# Altium PCB CH32V20xG8-R0-1v1.PcbDoc
Units mil, origin at the board's own origin, x right, y up, seen from the top; angles counter-clockwise.
Board outline 1755.91 x 2204.72 mil, 2 copper layers (Top Layer, Bottom Layer); 24 components, 39 nets, 126 pads, 528 vias.
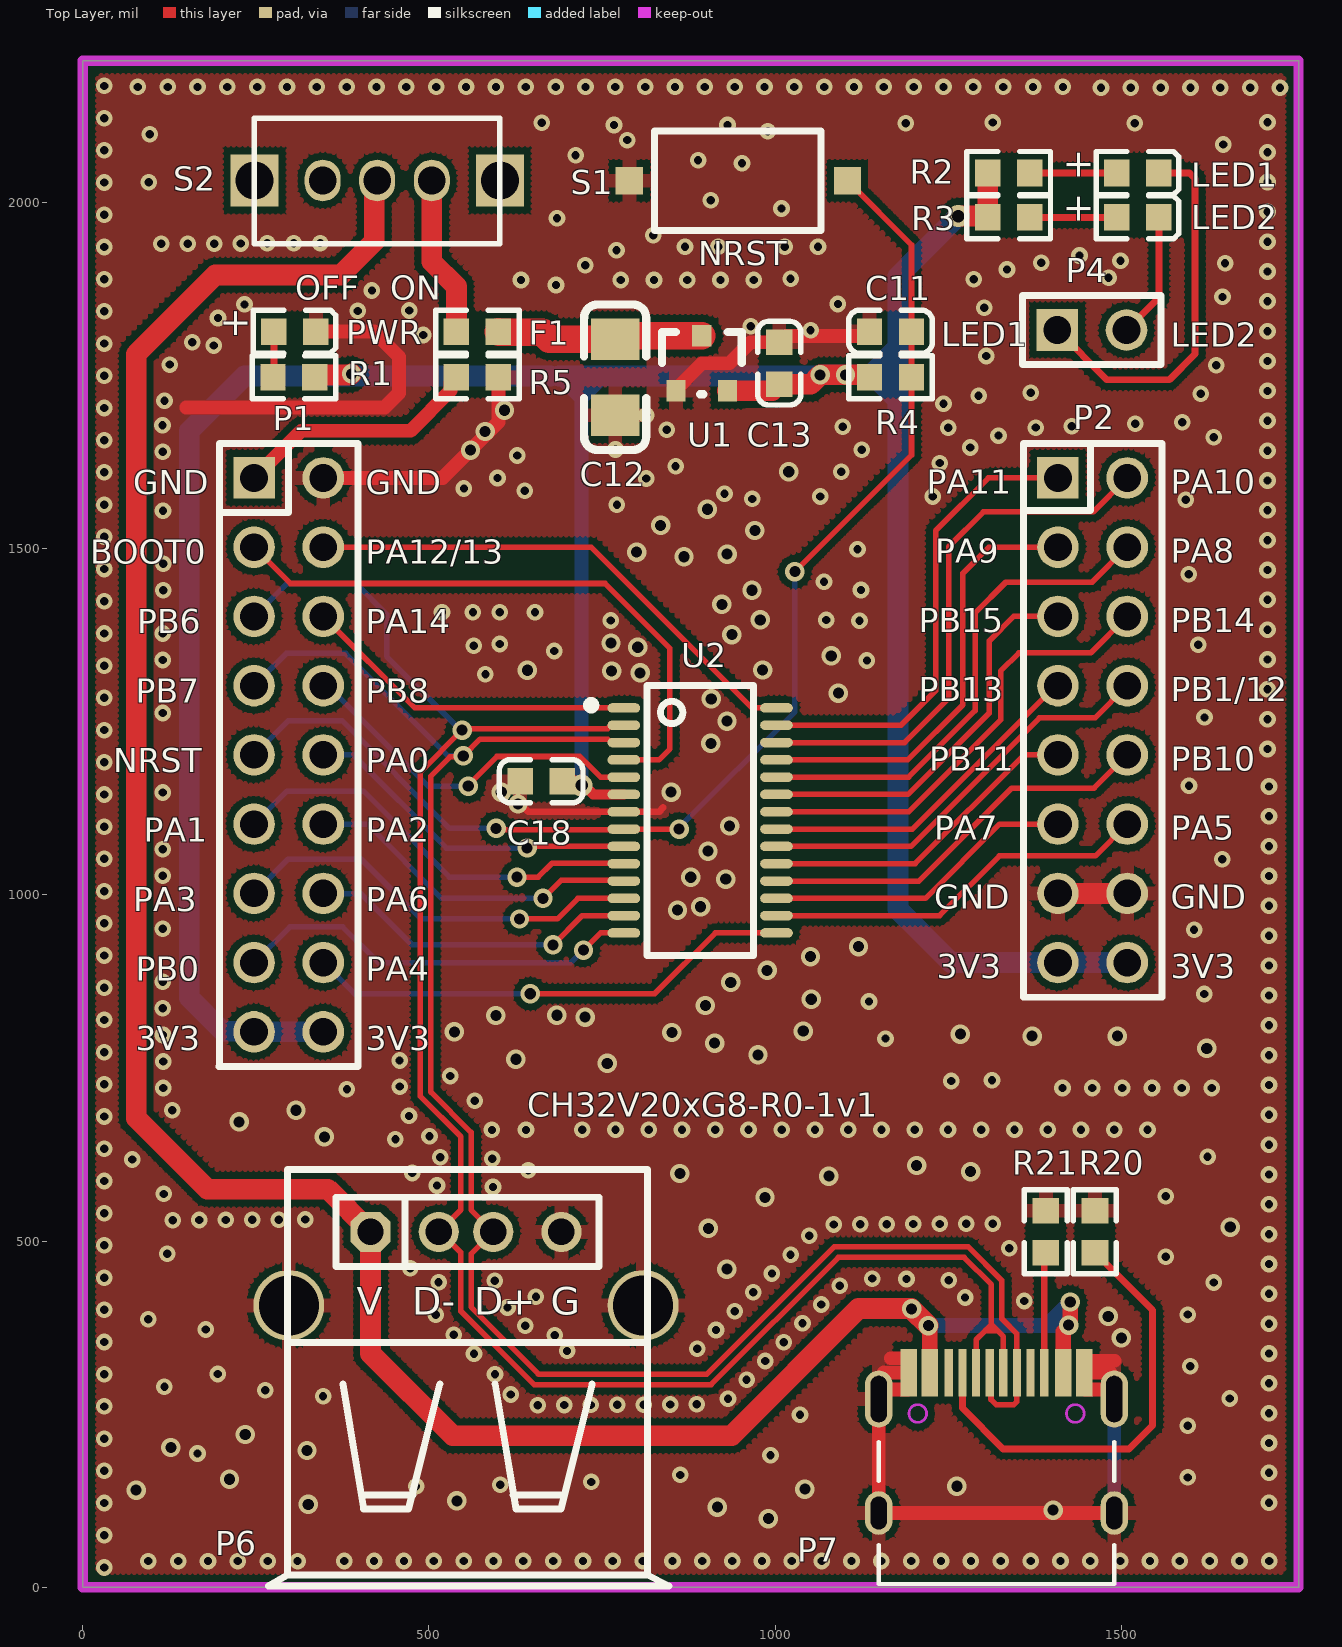
[diagram p0: Top Layer view]
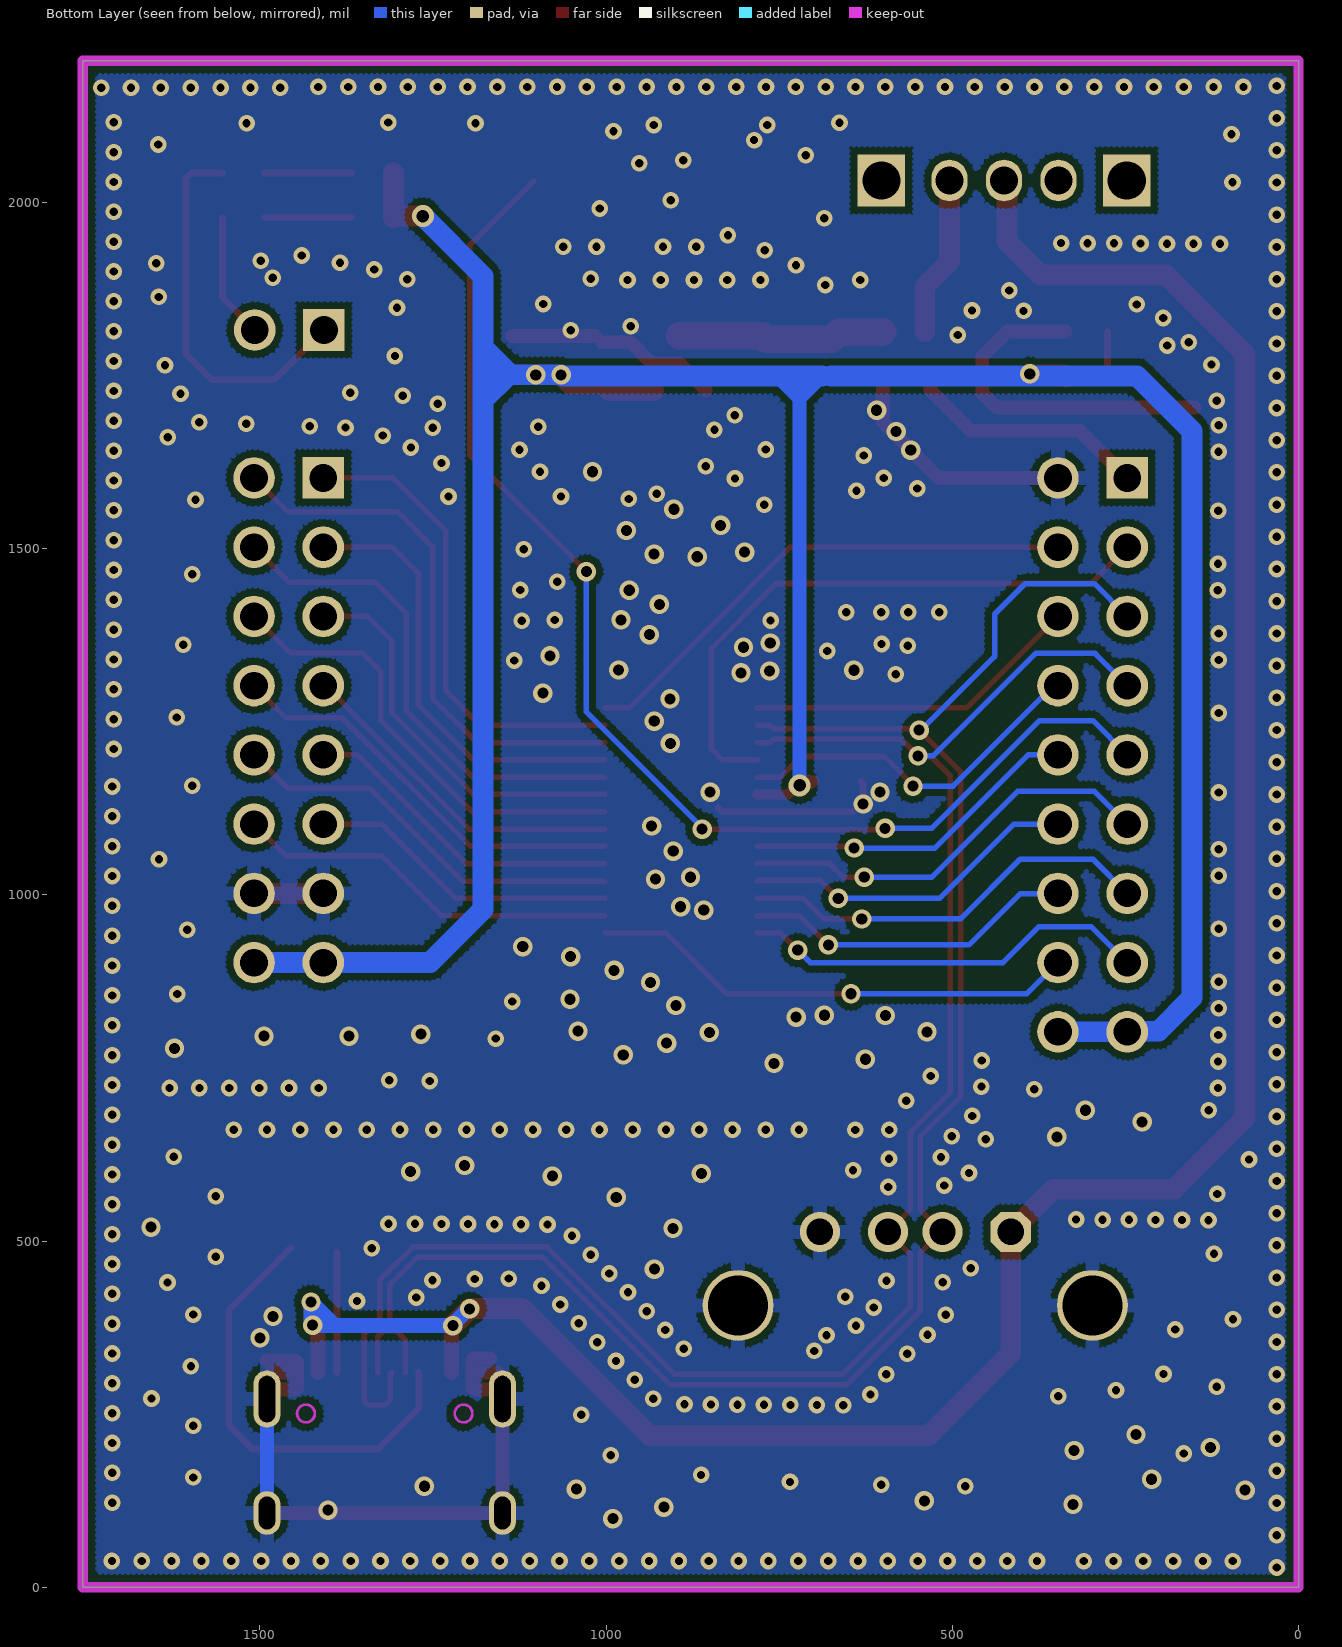
[diagram p1: Bottom Layer view, seen from below]

## Layer stack, top to bottom
Top Solder: solder mask 0.4, Solder Resist, Dk 3.5
Top Layer: signal copper 1.4
Dielectric 1: dielectric 12.6, FR-4, Dk 4.8
Bottom Layer: signal copper 1.4
Bottom Solder: solder mask 0.4, Solder Resist, Dk 3.5

## Board outline
0,0 0,2204.72 1755.91,2204.72 1755.91,0 1751.97,0

## Design rules (kind name [scope] priority, off if disabled: settings)
Clearance Clearance_1 [InPolygon] p1: gap=10 ignorepadtopadclearanceinfootprint=FALSE
Clearance [All] p2: gap=7 ignorepadtopadclearanceinfootprint=FALSE
ComponentClearance [All] p1 off: gap=10 collisioncheckmode=3 verticalgap=10 showdistances=FALSE
DiffPairsRouting [All] p1: maxlimit=10 minlimit=7 mostfreqgap=8 toplayer_minwidth=6 toplayer_maxwidth=15 toplayer_prefwidth=8 bottomlayer_minwidth=6 bottomlayer_maxwidth=15 bottomlayer_prefwidth=8 maxuncoupledlength=500
MinimumSolderMaskSliver [All] p1 off: minsoldermaskwidth=10
PolygonConnect PolygonConnect_1 [IsVia] p1: connectstyle=Direct reliefconductorwidth=10 reliefentries=4 polygonreliefangle="90 Angle" airgapwidth=10
PolygonConnect [All] p2: connectstyle=Relief reliefconductorwidth=20 reliefentries=4 polygonreliefangle="90 Angle" airgapwidth=10
RoutingVias [All] p1: holewidth=16 width=28 viastyle="Through Hole" minholewidth=12 minwidth=24 maxholewidth=28 maxwidth=50
SilkToSilkClearance [All] p1 off: silktosilkclearance=10
SilkToSolderMaskClearance [IsPad] p1 off: minsilkscreentomaskgap=10 clearancetoexposedcopper=TRUE
SolderMaskExpansion [All] p1: expansion=4 istentingtop=FALSE
Width [All] p1: maxlimit=100 minlimit=6 preferedwidth=10
25 further rules are at their usual default settings.

## Classes and differential pairs
differential pair NewDifferentialPair1: +PB6 -PB7

## Components (designator, comment, footprint, x,y, rotation, side; value= is the part's Value field where it differs from the comment)
C11 "0.1uF" 0603_C 1136.33,1813.47 r0 top
C12 "10uF" 3216_C 769.01,1802.61 r90 top
C13 "2.2uF" 0603_C 1006.01,1798.24 r270 top
C18 "0.1uF" 0603_C 631.77,1163.97 r0 top
F1 "500mA" 0603 539.7,1813.47 r0 top
LED1 "LED1   blue" 0603+ 1493.6,2042.52 r0 top
LED2 "LED2  blue" 0603+ 1493.6,1978.52 r0 top
P1 "HEADER 9x2" IDC18-2.54MM 247.4,1602.17 r0 top
P2 "Header 8X2" IDC16-2.54mm 1408.5,1602.17 r0 top
P4 "2HEAD" SIP2-2.54mm 1407.5,1815.84 r270 top
P6 "USB_A" USBAF 415.69,513.31 r0 top
P7 "TYPE-C" TYPE-C-Receptacle-2.0 1319.74,310 r0 top
PWR "POWER  red" 0603+ 276.07,1813.47 r0 top
R1 "1K" 0603 274.69,1747.47 r0 top
R2 "1K" 0603 1306.97,2042.52 r0 top
R3 "1K" 0603 1306.97,1978.52 r0 top
R4 "10K" 0603 1196.96,1747.47 r180 top
R5 "10K" 0603 600.33,1747.47 r180 top
R20 "NC(5.1K)" 0603 1461.88,483.23 r90 top
R21 "NC(5.1K)" 0603 1391.02,483.23 r90 top
S1 "NRST" SMD_6.1x3.65x2.5mm-KEY 1104.42,2031.37 r180 top
S2 "SW" KEY2 425.33,2031.74 r0 top
U1 "6219P33M" SOT-23 856.6,1728.08 r0 top
U2 "CH32V203G8R" QSOP28 781.46,1270 r270 top

## Footprints (in the part's own frame and the unit in brackets; to place one, negate y for a bottom-side part, rotate by r counter-clockwise, add the part's x,y. Pads: shape width x height; smd on the part's side, far side on the other; paste and mask are expansions set on the pad)
0603 [mm]
  rect 0.93x0.98 smd: 1(0,0) 2(1.54,0)
  silkscreen extent -0.76,-0.79 2.3,0.79
0603+ [mm]
  rect 0.93x0.98 smd: 1(0,0) 2(1.54,0)
  silkscreen extent -0.76,-0.79 2.27,0.79
0603_C [mm]
  rect 0.93x0.98 smd: 1(0,0) 2(1.54,0)
  silkscreen extent -0.76,-0.79 2.31,0.79
3216_C [mil]
  rect 60x70 smd: 1(0,0) 2(-110,0)
  silkscreen extent -160,-45 50,45
IDC16-2.54mm [mil]
  rect 60x60 hole 40: 1(0,0)
  round 60 hole 40: 2(100,0) 3(0,-100) 4(100,-100) 5(0,-200) 6(100,-200) 7(0,-300) 8(100,-300) 9(0,-400) 10(100,-400) 11(0,-500) 12(100,-500) 13(0,-600) 14(100,-600) 15(0,-700) 16(100,-700)
  silkscreen extent -50,-750 150,50
IDC18-2.54MM [mil]
  rect 60x60 hole 40: 1(0,0)
  round 60 hole 40: 2(100,0) 3(0,-100) 4(100,-100) 5(0,-200) 6(100,-200) 7(0,-300) 8(100,-300) 9(0,-400) 10(100,-400) 11(0,-500) 12(100,-500) 13(0,-600) 14(100,-600) 15(0,-700) 16(100,-700) 17(0,-800) 18(100,-800)
  silkscreen extent -51,-850 150,50
KEY2 [mm]
  rect 1.75x1.9 hole 1.4: 0(-4.5,0) 0(4.5,0)
  oval 1.321x1.524 hole 1.016: 1(0,0) 2(-2,0) 3(2,0)
  silkscreen extent -4.51,-2.31 4.5,2.29
QSOP28 [mm]
  oval 0.35x1.2 smd mask+0.102: 1(0,0) 2(0.635,0) 3(1.27,0) 4(1.905,0) 5(2.54,0) 6(3.175,0) 7(3.81,0) 8(4.445,0) 9(5.08,0) 10(5.715,0) 11(6.35,0) 12(6.985,0) 13(7.62,0) 14(8.255,0) 15(8.255,5.6) 16(7.62,5.6) 17(6.985,5.6) 18(6.35,5.6) 19(5.715,5.6) 20(5.08,5.6) 21(4.445,5.6) 22(3.81,5.6) 23(3.175,5.6) 24(2.54,5.6) 25(1.905,5.6) 26(1.27,5.6) 27(0.635,5.6) 28(0,5.6)
  silkscreen extent -0.82,-1.35 9.08,4.75
SIP2-2.54mm [mil]
  rect 60x60 hole 40: 1(0,0)
  round 60 hole 40: 2(0,100)
  silkscreen extent -50,-50 50,150
SMD_6.1x3.65x2.5mm-KEY [mm]
  rect 1x1 smd: 1(0,0) 2(8,0)
  silkscreen extent 0.98,-1.83 7.08,1.83
SOT-23 [mm]
  rect 0.7x0.8 smd: 1(0,0) 2(1.9,0) 3(0.95,2.02)
  silkscreen extent -0.51,-0.13 2.41,2.16
TYPE-C-Receptacle-2.0 [mm]
  oval 1x1.6 hole 0.6 slot 1.2 at 90 deg: 0(-4.32,-5.15) 0(4.32,-5.15)
  oval 1x2.1 hole 0.6 slot 1.7 at 90 deg: 0(-4.32,-0.97) 0(4.32,-0.97)
  rect 0.6x1.75 smd: A1(-3.225,0) A4(-2.45,0) B1(3.225,0) B4(2.45,0)
  rect 0.3x1.75 smd: A5(-1.25,0) A6(-0.25,0) A7(0.25,0) A8(1.25,0) B5(1.75,0) B6(0.75,0) B7(-0.75,0) B8(-1.75,0)
  Keep-Out Layer circle w0.1: c-2.89,-1.5 r0.325
  Keep-Out Layer circle w0.1: c2.89,-1.5 r0.325
  silkscreen extent -4.32,-7.75 4.32,-2.55
USBAF [mm]
  round 2.6 hole 2.2: 0(-3,-2.7) 0(10,-2.7)
  oct 1.473x1.473 hole 0.965: 1(0,0)
  round 1.473 hole 0.965: 2(2.5,0) 3(4.5,0) 4(7,0)
  silkscreen extent -3.75,-12.99 10.95,2.29

## Part data
C11 C18: library part Cap, "Capacitor", LatestRevisionDate=17-Jul-2002, LatestRevisionNote="Re-released for DXP Platform.", PackageReference=RAD-0.3, Published=8-Jun-2000, Publisher="Altium Limited"
C12 C13: library part CAP, "Capacitor"
F1: library part FUSE1, "Fuse"
LED1 LED2 PWR: library part LED0, "Typical INFRARED GaAs LED", LatestRevisionDate=08-Jul-2005, LatestRevisionNote="Mech Layer 1 removed.", PackageReference=LED-0, Published=8-Jun-2000, Publisher="Altium Limited"
P1: library part "Header 9X2", "Header, 9-Pin, Dual row", LatestRevisionDate=17-Jul-2002, LatestRevisionNote="Re-released for DXP Platform.", Publisher="Altium Limited"
P2: "Header, 8-Pin, Dual row", LatestRevisionDate=17-Jul-2002, LatestRevisionNote="Re-released for DXP Platform.", Publisher="Altium Limited"
P6: library part USB, "USB Port"
P7: library part TYPE-C1
R1 R2 R3: library part "Res Semi", "Semiconductor Resistor", LatestRevisionDate=17-Jul-2002, LatestRevisionNote="Re-released for DXP Platform.", PackageReference=AXIAL-0.5, Published=8-Jun-2000, Publisher="Altium Limited"
R4 R5 R20 R21: library part Res2, "Resistor"
  R4 R5: LatestRevisionDate=17-Jul-2002, LatestRevisionNote="Re-released for DXP Platform.", PackageReference=AXIAL-0.4, Published=8-Jun-2000, Publisher="Altium Limited"
S1: library part KEY
U2: "RISC-V LMD-MCU, 144MHz, for motor & wireless charging"

## Via types
v1: diameter 24, hole 12, Top Layer to Bottom Layer, tented both sides, 427 vias
v2: diameter 28, hole 16, Top Layer to Bottom Layer, tented both sides, 99 vias
v3: diameter 32, hole 18, Top Layer to Bottom Layer, tented both sides, 2 vias

## Nets (pads, with @x,y where several pads share a name; then routed paths per layer and width w, separated by ;. In a path a pad name is that pad's centre, name@x,y a point inside that pad or via, vN(x,y) a via of type N, cw(c..) or ccw(c..) an arc to the next point about the centre after c; other vN are vias at no path point)
+5V: P6.1 P7.A4 P7.B4 S2.1 | length 3629.3
  Top Layer w22: v2@1196.69,402.45 v2(1197.08,402.05) ; v2(1221.25,377.89) 1223.28,375.85 P7.A4 ; P7.B4 1416.2,369.21 1423.84,376.85 v2@1423.84,378.26 ; v2(1423.84,378.48) v2@1423.84,378.26 ; v2(1426.21,411.93) 1426.21,380.63 v2@1423.84,378.26
  Top Layer w30: S2.1@421.12,2039 421.12,1943.64 372.59,1895.11 191.36,1895.11 77.19,1780.94 77.19,677.71 179.92,574.98 354.02,574.98 P6.1 415.69,337.65 534.55,218.79 936.83,218.79 1120.5,402.45 v2@1196.69,402.45 ; v2(1197.08,402.05) v2(1221.25,377.89)
  Bottom Layer w22: v2(1197.08,402.05) 1199.11,402.05 v2@1222.99,378.18 ; v2(1221.25,377.89) 1221.83,378.48 1222.13,378.18 v2@1222.99,378.18 ; v2@1222.99,378.18 1392.46,378.18 ; 1392.46,378.18 1423.54,378.18 v2(1423.84,378.48) 1426.21,380.85 v2(1426.21,411.93) 1392.46,378.18
BOOT0: P1.3 U2.4 | length 879.6
  Top Layer w8: P1.3 299.88,1449.7 697.72,1449.7 754.42,1449.7 848.1,1356.02 848.1,1210.94 832.16,1195 U2.4
GND: C11.1 C12.2 C13.1 C18.1 P1.2 P2.13 P2.14 P6.0 P6.4 P7.0 P7.A1 P7.B1 PWR.2 R5.1 R20.2 R21.2 S1.2 U1.1 U2.7 | length 2502.9
  Top Layer w10: C18.1 628.69,1160.89 628.69,1134.34 631.77,1131.27 632.28,1131.27 643.55,1120 U2.7 832.09,1120 838.05,1125.96
  Top Layer w20: 149.88,1703.98 436.05,1703.98 456.85,1724.78 456.85,1777.23 420.61,1813.47 PWR.2 ; P1.2 519.8,1602.17 600.33,1682.71 R5.1 ; U1.1 856.6,1730.05 894.33,1767.78 934.33,1767.78 964.8,1798.24 C13.1 ; C13.1@1015.9,1807.15 C11.1@1136.33,1807.15 ; P7.0@1156.8,310 P7.A1 ; 1166.96,330.85 1190.96,330.85 1192.77,329.04 P7.A1@1192.77,325.18 ; P7.A1@1190.96,326.99 P7.A1@1192.77,325.18 ; P7.0@1483.49,310 P7.B1 ; P7.0@1489.82,107.24 1149.66,107.24 1149.66,271.81 1149.66,276.6 1158.61,285.55 1190.96,285.55 1192.77,287.36 P7.A1 ; P7.0@1489.82,271.81 1489.82,276.6 1480.87,285.55 1448.52,285.55 1446.71,287.36 P7.B1 ; 1490.4,327.14 1448.52,327.14 1446.71,325.33 P7.B1 ; P7.A1 P7.A1@1192.77,325.18
  Top Layer w30: P2.13 P2.14
  Bottom Layer w20: P7.0@1489.82,107.24 P7.0@1489.82,271.81
  other v1: 31.26,28.58 94.77,37.8 137.87,37.8 180.97,37.8 224.07,37.8 267.17,37.8 310.27,37.8 377.67,37.87 420.77,37.87 463.87,37.87 506.97,37.87 550.07,37.87 593.17,37.87 636.27,37.87 679.38,37.87 722.48,37.87 765.58,37.87 808.68,37.87 851.78,37.87 894.88,37.87 937.98,37.87 981.08,37.87 1024.18,37.87 1067.28,37.87 1110.38,37.87 1153.48,37.87 1196.58,37.87 1239.68,37.87 1282.78,37.87 1325.88,37.87 1368.98,37.87 1412.08,37.87 1455.18,37.87 1498.28,37.87 1541.38,37.87 1584.48,37.87 1627.58,37.87 1670.68,37.87 1713.78,37.87 31.26,75.1 31.26,121.61 1713.22,122.07 481.42,146.08 602.84,148.1 734.37,152.15 1596.09,158.64 862.86,162.27 1713.22,165.17 31.26,168.13 993.38,190.6 165.72,193.1 1713.22,208.28 31.26,214.65 1596.09,233.47 1035.88,249.28 1713.22,251.38 31.26,261.17 657.3,262.95 695.56,263.15 733.83,263.34 772.09,263.54 810.35,263.73 848.61,263.93 886.88,264.12 931.85,272.35 1656.66,272.67 347.13,275.88 618.3,278.47 263.55,284.45 117.98,289.6 1713.22,294.48 958.77,299.54 31.26,307.68 194.98,308.03 595.4,307.75 1599.65,318.99 985.69,326.74 565.05,337.03 1713.22,337.58 699.52,341.33 887.7,344.42 31.26,354.2 1012.61,353.93 681.65,364.19 535.77,364.72 177.83,372.32 914.62,371.61 639.06,377.5 1039.53,381.12 1713.22,380.68 94.61,387.12 509.68,393.47 1596.09,393.82 941.54,398.8 31.26,400.72 613.5,404.12 1066.44,408.32 1359.78,413.43 1274.35,418.46 654.5,419.56 1713.22,423.78 968.46,426 1093.36,435.51 513.94,440.32 1633.5,440.15 594.99,442.84 1250.69,443.6 1189.75,445.27 1140.45,445.82 31.26,447.24 995.38,453.19 473.17,460.89 1713.22,466.88 1564.02,477.56 1022.29,480.38 122.11,481.61 1338.34,489.49 31.26,493.75 1049.21,507.58 1713.22,509.98 1084.72,523.99 1122.99,524.19 1161.25,524.38 1199.51,524.58 1237.77,524.77 1276.04,524.97 1314.3,525.16 129.94,530.16 168.21,530.35 206.47,530.55 244.73,530.74 282.99,530.94 321.26,531.13 31.26,540.27 1713.22,553.08 1564.02,564.87 117.15,568.06 592.54,578.1 511.69,580.18 31.26,586.79 1713.22,596.18 475.93,598.32 643.33,602.46 71.54,617.83 591.5,619.05 516.35,621.12 1624.59,621.88 31.26,633.31 1713.22,639.28 451.57,647.03 500.81,651.18 590.98,660.51 640.22,660.51 721.37,660.96 769.4,660.96 817.43,660.96 865.45,660.96 913.48,660.96 961.51,660.96 1009.53,660.96 1057.56,660.96 1105.59,660.96 1153.61,660.96 1201.64,660.96 1249.67,660.96 1297.69,660.96 1345.72,660.96 1393.75,660.96 1441.77,660.96 1489.8,660.96 1537.83,660.96 31.26,679.82 471.27,680.72 1713.22,682.38 129.47,688.76 566.31,702.67 381.57,719.43 116.37,721.11 1414.97,721.05 1458.07,721.05 1501.17,721.05 1544.27,721.05 1587.37,721.05 1630.47,721.05 457.98,723.13 31.26,726.34 1713.22,725.48 1254.6,731.26 1313.22,732.11 531,738.38 116.17,759.37 457.58,760.85 1713.22,768.58 31.26,772.86 1159.43,792.44 115.98,797.64 1713.22,811.68 31.26,819.38 115.37,836.18 1135.64,845.96 1713.22,854.78 1619.63,856.8 31.26,865.89 115.37,874.44 1713.22,897.88 31.26,912.41 1713.22,940.98 1605.1,949.84 115.37,950.97 31.26,958.93 1713.22,984.08 31.26,1005.45 1713.22,1027.18 115.37,1027.49 31.26,1051.96 1645.8,1051.6 115.37,1065.75 1713.22,1070.28 31.26,1098.48 1713.22,1113.38 31.26,1145 115.37,1147.87 1713.22,1156.48 1597.83,1157.72 31.26,1191.51 1711.16,1210.65 31.26,1238.03 1711.16,1253.75 1620.09,1256.29 115.37,1262.66 31.26,1284.55 1711.16,1296.85 581.58,1318.72 31.26,1331.07 115.37,1339.18 1132.58,1338.57 1711.16,1339.95 680.81,1352.18 564.54,1359.92 1610.97,1361.05 602.17,1362.32 31.26,1377.58 115.37,1377.45 1711.16,1383.05 762.46,1396.31 1121.93,1396.01 1074.05,1397.02 518.88,1408.05 563.54,1408.05 602.48,1408.05 653.11,1408.05 31.26,1424.1 1711.16,1426.15 116.42,1439.84 1123.94,1440.36 1070.53,1452.45 1597.54,1463.25 1711.16,1469.25 31.26,1470.62 116.22,1478.1 1118.91,1499.32 1711.16,1512.35 31.26,1517.14 115.83,1554.62 1711.16,1555.45 31.26,1563.65 771.53,1563.55 1593.06,1570.67 967.14,1571.85 1227.7,1575.32 1065.2,1575.38 926.8,1579.41 638.43,1583.87 550.54,1586.91 1711.16,1598.55 813.83,1601.34 599,1602.11 31.26,1610.17 1095.55,1611.04 856.2,1618.92 1237.75,1623.65 627.73,1634.64 115.44,1640.15 1711.16,1641.66 769.5,1643.3 1125.14,1642.91 1281.9,1646.19 31.26,1656.69 1633.35,1660.94 1322.66,1663.33 843.59,1671.87 1250.25,1674.53 1376.39,1674.91 1097.82,1676.29 1428.27,1676.77 115.25,1678.41 1519.96,1680.33 1587.84,1682.57 1711.16,1684.76 814.01,1692.61 31.26,1703.21 1243.1,1709.35 118.05,1713.68 1293.82,1720.75 1614.72,1723.74 1369.37,1725.24 1711.16,1727.86 31.26,1749.72 1637.16,1764.88 125.63,1765.9 1711.16,1770.96 1305.04,1778.35 189.4,1793.4 31.26,1796.24 158.31,1798.18 491.97,1808.67 1711.16,1814.06 1051.19,1815.6 964.62,1821.48 195.38,1833.25 31.26,1842.76 397.07,1843.4 471.61,1844.04 1302.05,1847.91 233.64,1852.78 1090.7,1853.42 1711.16,1857.16 1646.14,1863.62 417.63,1872.96 683.44,1880.82 632.93,1888.01 777.01,1888.01 825.04,1888.01 873.06,1888.01 921.09,1888.01 969.12,1888.01 31.26,1889.28 1287.09,1889.05 1022.29,1889.8 1481.57,1891.3 1711.16,1900.26 1334.96,1903.26 725.68,1909.55 1649.88,1912.24 1384.33,1912.99 1498.78,1915.98 1439.69,1923.46 770.96,1931.09 31.26,1935.79 869.76,1935.88 917.79,1935.88 1013.84,1935.88 1061.87,1935.88 113.33,1940.21 151.59,1940.4 189.85,1940.6 228.12,1940.79 266.38,1940.99 304.64,1941.18 342.9,1941.38 1711.16,1943.36 824.07,1952.63 684.94,1977.32 31.26,1982.31 1711.16,1986.46 1009.2,1991.38 906.82,2003.16 31.26,2028.83 95.36,2029.14 1711.16,2029.56 952.12,2056.61 888.7,2061.14 711.81,2068.12 1711.16,2072.66 31.26,2075.35 1647.02,2083.79 786.32,2090.13 96.7,2098.6 989.27,2102.82 767.29,2111.88 931.28,2111.88 662.88,2115.06 1188.59,2114.59 1519.28,2114.59 1314.52,2115.5 1711.16,2115.76 31.26,2121.86 1470.64,2165.7 1513.74,2165.7 1556.84,2165.7 1599.94,2165.7 1643.04,2165.7 1686.14,2165.7 1729.24,2165.7 79.55,2166.9 122.65,2166.9 165.75,2166.9 208.85,2166.9 251.95,2166.9 295.05,2166.9 338.15,2166.9 381.25,2166.9 424.35,2166.9 467.45,2166.9 510.55,2166.9 553.65,2166.9 596.75,2166.9 639.85,2166.9 682.95,2166.9 726.05,2166.9 769.15,2166.9 812.25,2166.9 855.35,2166.9 898.45,2166.9 941.56,2166.9 984.66,2166.9 1027.76,2166.9 1070.86,2166.9 1113.96,2166.9 1157.06,2166.9 1200.16,2166.9 1243.26,2166.9 1286.36,2166.9 1329.46,2166.9 1372.56,2166.9 1415.66,2166.9 31.26,2168.38
  other v2: 990.29,99.05 1401.63,111.49 916.6,115.79 325.67,119.82 540.32,124.8 77.12,140.19 1042.88,141.62 1262.44,145.93 212.01,155.97 323.94,197.59 127.35,201.89 234.73,220.66 1499.97,360.1 1481.16,391.34 930.36,459.38 903.48,518.26 1657.28,520.18 985.4,563.06 1077.56,593.78 862.52,597.62 1282.36,600.18 1204.28,609.14 349.01,650.4 225.76,672.22 307.93,688.91 757.54,756.75 625.58,762.55 975.31,768.9 1623.36,778.25 912.68,785.8 1371.3,795.91 1494.18,795.91 1267.56,798.93 850.85,801.26 536.62,802.17 1040.58,803.11 725.59,823.32 596.7,825.8 684.81,826.18 899.33,840.21 1052.12,849.27 935.89,873.59 988.35,891.07 1051.16,910.82 1120.4,925.24 858.99,977.86 892.41,982.83 928.67,1022.65 878.19,1025.5 903.07,1063.18 934.36,1099.45 628.69,1131.27 849.71,1148.33 604.4,1148.49 907.2,1218.73 930.45,1250.96 907.73,1283.2 1091.32,1291.26 805.14,1320.73 763.79,1323.4 642.26,1324.39 981.93,1324.74 1081.04,1345.25 801.58,1357.63 762.9,1363.86 937.54,1375.96 978.51,1397.3 923.03,1419.49 966.56,1439.97 868.4,1488.31 930.71,1492.04 799.98,1494.96 970.83,1526.18 834.65,1533.68 902.14,1556.92 1019.72,1611.09 560.06,1642.44 581.17,1669.17 609.2,1699.91
LED1: LED1.2 P4.1 | length 553.3
  Top Layer w10: P4.1 1479.39,1743.95 1569.25,1743.95 1606.72,1781.42 1606.72,2034.37 1598.57,2042.52 LED1.2
LED2: LED2.2 P4.2 | length 182
  Top Layer w10: P4.2 1554.23,1862.56 LED2.2
NetC12_1: C12.1 F1.2 U1.3 | length 300.2
  Top Layer w40: F1.2 601.22,1812.58 664.03,1812.58 674.01,1802.61 C12.1 774.01,1807.61 U1.3
NetF1_1: F1.1 S2.3 | length 233
  Top Layer w30: S2.3 504.07,1914.49 539.7,1878.86 F1.1
NetLED1_1: LED1.1 R2.2 | length 126
  Top Layer w10: R2.2 LED1.1
NetLED2_1: LED2.1 R3.2 | length 126
  Top Layer w10: R3.2 LED2.1
NetP1_1: P1.1 R5.2 | length 358.8
  Top Layer w20: P1.1 315.48,1670.25 473.25,1670.25 531.4,1728.39 531.4,1739.17 R5.2
NetP7_A5: P7.A5 R20.1 | length 658
  Top Layer w10: P7.A5 1270.53,258.73 1329.29,199.96 1511.09,199.96 1544.98,233.85 1544.98,400.13 1476.17,468.94 1476.17,469.92 1456.14,489.96 R20.1@1455.15,489.96
NetP7_B5: P7.B5 R21.1 | length 173.2
  Top Layer w10: P7.B5 R21.1@1388.64,483.23
NetPWR_1: PWR.1 R1.1 | length 66.6
  Top Layer w10: R1.1 276.07,1748.85 PWR.1
NRST: C11.2 P1.9 R4.1 S1.1 U2.8 | length 1807.7
  Top Layer w8: v2(597,1096) 599.16,1093.84 759.48,1093.84 759.54,1093.89 780.36,1093.89 U2.8 v2(861.27,1095) ; v2(1028.5,1466.76) 1196.96,1635.22 C11.2@1196.96,1807.15 ; S1.1 1196.96,1938.83 C11.2
  Bottom Layer w8: P1.9 296.91,1251.68 374.21,1251.68 529.89,1096 v2(597,1096) ; v2(861.27,1095) 861.27,1097.13 1028.5,1264.36 v2(1028.5,1466.76)
PA0: P1.10 U2.9 | length 490.8
  Top Layer w8: v2(641.9,1067.65) 644.25,1070 U2.9
  Bottom Layer w8: P1.10 390.65,1202.17 525.17,1067.65 v2(641.9,1067.65)
PA1: P1.11 U2.10 | length 614
  Top Layer w8: v2(627.17,1025.58) 657.6,1025.58 677.74,1045.71 780.75,1045.71 U2.10
  Bottom Layer w8: P1.11 295.15,1149.93 405.28,1149.93 529.63,1025.58 v2(627.17,1025.58)
PA2: P1.12 U2.11 | length 489.7
  Top Layer w8: v2(664.69,994.88) 690.79,1020.98 780.48,1020.98 U2.11
  Bottom Layer w8: P1.12 410.98,1102.17 518.27,994.88 v2(664.69,994.88)
PA3: P1.13 U2.12 | length 602.5
  Top Layer w8: v2(630.84,965.23) 685.41,965.23 715.18,995 U2.12
  Bottom Layer w8: P1.13 296.69,1051.46 402.2,1051.46 488.43,965.23 v2(630.84,965.23)
PA4: P1.16 U2.15 | length 709.5
  Top Layer w8: v2(646.38,857.16) 825.89,857.16 913.73,945 U2.15
  Bottom Layer w8: P1.16 392.3,857.27 v2@646.38,857.27
PA5: P2.12 U2.16 | length 561.3
  Top Layer w8: U2.16 1237.61,970 1323.94,1056.33 1462.66,1056.33 P2.12
PA6: P1.14 U2.13 | length 483.8
  Top Layer w8: v2(679.12,927.71) 721.4,970 U2.13
  Bottom Layer w8: P1.14 349.87,999.71 351.55,1001.4 402.2,1001.4 475.88,927.71 v2(679.12,927.71)
PA7: P2.11 U2.17 | length 451
  Top Layer w8: U2.17 1216.89,995 1324.06,1102.17 P2.11
PA8: P2.4 U2.24 | length 726.8
  Top Layer w8: U2.24 1192.68,1170 1288.94,1266.26 1288.94,1407.37 1333.06,1451.48 1457.81,1451.48 P2.4
PA9: P2.3 U2.25 | length 645
  Top Layer w8: U2.25 1191.45,1195 1270.99,1274.54 1270.99,1464.4 1308.76,1502.17 P2.3
PA10: P2.2 U2.26 | length 793.2
  Top Layer w8: U2.26 1186.84,1220 1250.47,1283.63 1250.47,1502.77 1300.85,1553.15 1459.48,1553.15 P2.2
PA11: P2.1 U2.27 | length 689.8
  Top Layer w8: U2.27 1181.86,1245 1231.95,1295.08 1231.95,1526.02 1308.1,1602.17 P2.1
PA12: P1.4 U2.28 | length 750.7
  Top Layer w8: P1.4 734.14,1502.17 855.84,1380.48 966.31,1270 U2.28
PA14: P1.6 U2.1 | length 488.8
  Top Layer w8: P1.6 479.57,1270 U2.1
PB0: P1.15 U2.14 | length 594.7
  Top Layer w8: v2(723.19,920.11) 748.09,945 U2.14
  Bottom Layer w8: P1.15 299.08,953.85 375.28,953.85 427.07,902.06 705.15,902.06 v2(723.19,920.11)
PB1: P2.8 U2.20 | length 602.7
  Top Layer w8: U2.20 1196.08,1070 1381.79,1255.71 1462.04,1255.71 P2.8
PB6: P1.5 P6.2 P7.A7 P7.B7 U2.2 | length 2728
  Top Layer w8: v2(548,1238) 487.74,1177.74 487.74,709.07 545.99,650.83 545.99,545.18 P6.2 516.32,513.31 545.99,483.64 545.99,398.78 652.02,292.74 907.63,292.74 1091.35,476.47 1273,476.47 1312.24,437.23 1312.24,379.48 ; v2@548,1240 758.17,1240 763.17,1245 U2.2 ; P7.B7 1290.21,357.45 1303.57,370.81 ; P7.A7 1329.58,362.14 1320.91,370.81 ; 1303.57,370.81 1312.24,379.48 ; 1303.57,370.81 1320.91,370.81 ; 1312.24,379.48 1320.91,370.81
  Bottom Layer w8: P1.5 294.82,1449.6 343.64,1449.6 394.64,1449.6 438.97,1405.27 438.97,1344.27 545.24,1238 v2(548,1238)
PB7: P1.7 P6.3 P7.A6 P7.B6 U2.3 | length 2671.7
  Top Layer w8: U2.3 763.17,1220 758.17,1225 573.73,1225 v2(549.52,1200.79) 547.9,1199.17 530.38,1199.17 502.74,1171.53 502.74,715.29 560.99,657.04 560.99,545.18 P6.3 560.99,481.44 560.99,404.99 658.23,307.74 901.42,307.74 1085.14,491.47 1279.21,491.47 1327.24,443.44 1327.24,388.07 1328.92,386.39 1349.27,366.04 P7.B6 1349.27,268.21 1344.58,263.53 1319.47,263.53 1311.8,271.19 1311.8,308.09 P7.A6
  Bottom Layer w8: P1.7 293.93,1348.7 379.79,1348.7 527.7,1200.79 v2(549.52,1200.79)
PB8: P1.8 U2.5 | length 528.2
  Top Layer w8: P1.8 P1.8@349.46,1304.23 ; v2(556.83,1157.01) 556.83,1158.59 598.09,1199.85 718.13,1199.85 747.98,1170 U2.5
  Bottom Layer w8: P1.8 353.72,1302.17 498.88,1157.01 v2(556.83,1157.01)
PB10: P2.10 U2.18 | length 582
  Top Layer w8: U2.18 1207.51,1020 1341.75,1154.23 1460.56,1154.23 P2.10
PB11: P2.9 U2.19 | length 471.7
  Top Layer w8: U2.19 1202.13,1045 1359.3,1202.17 P2.9
PB13: P2.7 U2.21 | length 492.4
  Top Layer w8: U2.21 1198.24,1095 1340.74,1237.5 1405.41,1302.17 P2.7
PB14: P2.6 U2.22 | length 664.7
  Top Layer w8: U2.22 1192.9,1120 1325.74,1252.85 1325.74,1323.23 1352.02,1349.51 1455.84,1349.51 P2.6
PB15: P2.5 U2.23 | length 574.2
  Top Layer w8: U2.23 1191.66,1145 1309.3,1262.64 1309.3,1366.92 1344.56,1402.17 P2.5
VCC: C13.2 C18.2 P1.17 P1.18 P2.15 P2.16 R1.2 R2.1 R3.1 R4.2 U1.2 U2.6 | length 4739.7
  Top Layer w15: C18.2@699.4,1164.97 702.27,1162.1 C18.2@707.4,1162.1 ; v3(720.53,1158.07) 724.1,1158.07 737.17,1145 U2.6
  Top Layer w20: C18.2@707.4,1163.98 707.4,1162.1 707.4,1161.84 C18.2@707.71,1161.53
  Top Layer w30: R1.2 338.52,1750.67 386.28,1750.67 v2(388.13,1752.52) ; U1.2 995.49,1728.08 1005.02,1737.61 C13.2 1010.3,1737.61 1051.59,1737.61 v2(1065.05,1751.06) v2(1101.62,1751.06) R4.2@1132.74,1751.06 ; v3(1264.56,1980.41) R3.1@1306.97,1980.41 ; R3.1 R2.1
  Bottom Layer w20: 675.36,1749.52 688,1749.52 720.53,1716.98 ; v3(720.53,1158.07) 720.53,1716.98 ; 720.53,1749.52 720.53,1716.98 ; 753.06,1749.52 720.53,1716.98
  Bottom Layer w30: P1.18@355.52,802.17 P1.17 246.48,803.09 202.25,803.09 153.79,851.55 153.79,1669.87 233.44,1749.52 675.36,1749.52 ; 688,1749.52 720.53,1749.52 753.06,1749.52 1063.5,1749.52 v2(1065.05,1751.06) v2(1101.62,1751.06) 1138.19,1751.06 ; v3(1264.56,1980.41) 1177.65,1893.5 1177.65,1790.52 ; P2.16 P2.15 1254.17,902.17 1177.65,978.7 1177.65,1714.35 ; 1138.19,1751.06 1140.93,1751.06 ; 1138.19,1751.06 1177.65,1790.52 ; 1140.93,1751.06 1177.65,1751.06 ; 1140.93,1751.06 1177.65,1714.35 ; 1177.65,1714.35 1177.65,1751.06 ; 1177.65,1751.06 1177.65,1790.52
pads on no net: P7.A8 P7.B8 S2.0 S2.2

## Polygon pours and split planes (outlines as drawn)
GND on Bottom Layer "GND" (hatched 90Degree grid 8 track 8, remove dead copper, pour order 0): 0,2204.72 0,0 1755.91,0 1755.91,2204.72
GND on Top Layer "GND" (hatched 90Degree grid 8 track 8, remove dead copper, pour order 1): 0,2204.72 0,0 1755.91,0 1755.91,2204.72

## Keep-outs
Keep-Out Layer:
  lines w15: 0,0 0,2204.72 1755.91,2204.72 1755.91,0 0,0

## Silkscreen, mask and mechanical layers (free items; w line width, h text height)
Top Overlay:
  text "ON" at 444.34,1859.52 h35
  text "OFF" at 306.89,1859.18 h35
  text "LED1" at 1239.95,1792.56 h35
  text "LED2" at 1571.31,1791.87 h35
  text "GND" at 73.03,1578.85 h35
  text "GND" at 408.96,1578.85 h35
  text "PA11" at 1219.01,1579.32 h35
  text "PA10" at 1571.59,1579.32 h35
  text "PA9" at 1231.34,1479.39 h35
  text "PA8" at 1571.59,1479.39 h35
  text "BOOT0" at 10.71,1478.48 h35
  text "PA12/13" at 408.96,1478.48 h35
  text "PB15" at 1207.68,1379.45 h35
  text "PB14" at 1571.59,1379.45 h35
  text "PB6" at 78.37,1378.1 h35
  text "PA14" at 408.96,1378.1 h35
  text "PB13" at 1207.68,1279.52 h35
  text "PB1/12" at 1571.59,1279.52 h35
  text "PB7" at 76.7,1277.73 h35
  text "PB8" at 408.96,1277.73 h35
  text "PB11" at 1222.67,1179.59 h35
  text "PB10" at 1571.59,1179.59 h35
  text "NRST" at 43.71,1177.35 h35
  text "PA0" at 408.96,1177.35 h35
  text "PA7" at 1229.67,1079.65 h35
  text "PA5" at 1571.59,1079.65 h35
  text "PA1" at 88.03,1076.98 h35
  text "PA2" at 408.96,1076.98 h35
  text "GND" at 1229.67,979.72 h35
  text "GND" at 1571.59,979.72 h35
  text "PA3" at 73.03,976.6 h35
  text "PA6" at 408.96,976.6 h35
  text "3V3" at 1233.34,879.78 h35
  text "3V3" at 1571.59,879.78 h35
  text "PB0" at 76.7,876.23 h35
  text "PA4" at 408.96,876.23 h35
  text "3V3" at 76.7,775.85 h35
  text "3V3" at 408.96,775.85 h35
  text "CH32V20xG8-R0-1v1" at 642.12,679.88 h35
Mechanical 1:
  lines w10: 1751.97,0 0,0 0,2204.72 1755.91,2204.72 1755.91,0

## Text inside footprints (layer, text, board x,y; h text height)
LED1: Top Overlay "+" at 1455.52,2031.53 h40 r90
LED2: Top Overlay "+" at 1455.52,1967.53 h40 r90
P6: Top Overlay "G" at 675.69,393.31 h40; Top Overlay "V" at 395.69,393.31 h40; Top Overlay "D+" at 565.69,393.31 h40; Top Overlay "D-" at 475.69,393.31 h40
PWR: Top Overlay "+" at 238,1802.49 h40 r90